# EAGLE board tirasRGB (EAGLE 6.5.0)
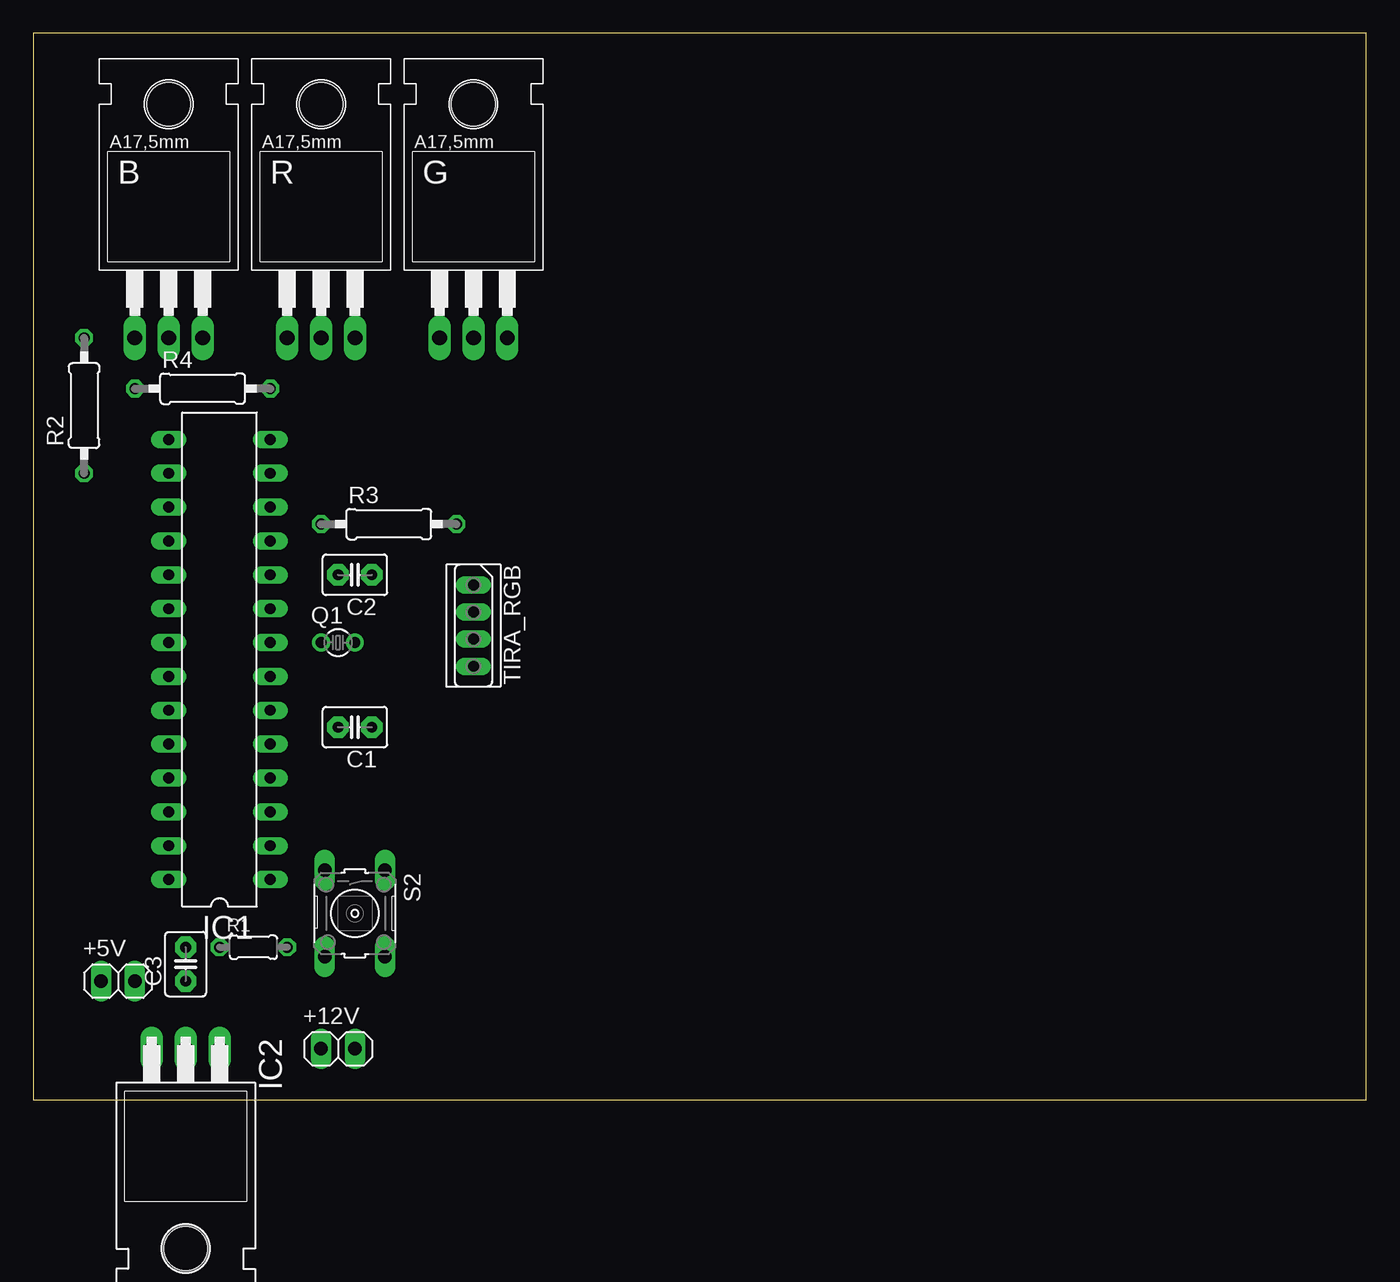
[diagram p0: board, top side]
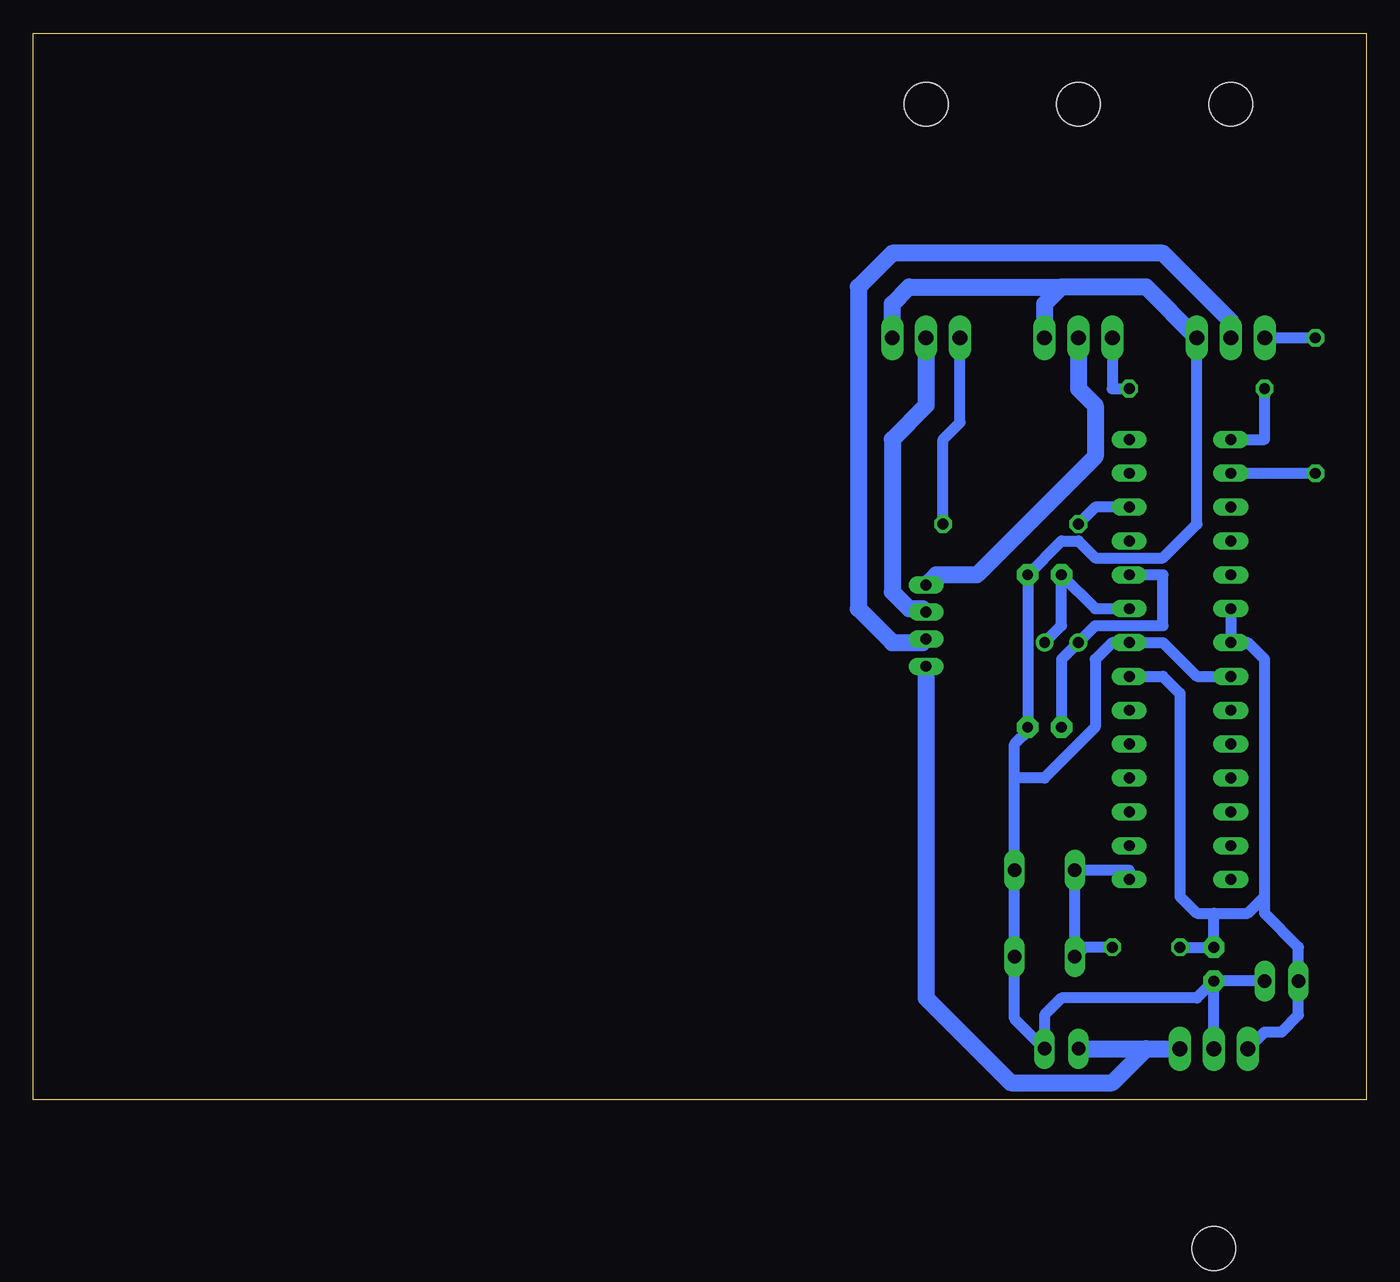
[diagram p1: board, bottom side, seen from below]

Size 100 x 80 mm. Coordinates in mm from the lower left corner, seen from the top.
Outline: 0,0 100,0 100,80 0,80 0,0
Copper layers (1*16): Top 0.035mm / dielectric 1.5mm / Bottom 0.035mm
Design rules "default": minimum track width 10mil, minimum drill 24mil, track to track 8mil, track to pad 8mil, pad to pad 8mil, via to via 8mil, smd to smd 8mil, copper to edge 40mil, drill to drill 8mil, minimum pad ring 10mil, minimum via ring 8mil, stop-mask expansion 4mil, vias tented up to drill 0mil, thermal gap 10mil

## Footprints (pad centres in the part's own frame; a part is rotated, then mirrored left to right if it is on the bottom)
1X02 = drill 1.016 long: 1 -1.27,0; 2 1.27,0
TO220 = drill 1.118 long: 1 -2.54,-6.35; 2 0,-6.35; 3 2.54,-6.35 | hole 3.302: 0,11.176
C2.5-3 = drill 0.813 pad 1.6 octagon: 1 -1.27,0; 2 1.27,0
DIL28-3 = drill 0.813 long: 1 -16.51,-3.81; 2 -13.97,-3.81; 3 -11.43,-3.81; 4 -8.89,-3.81; 5 -6.35,-3.81; 6 -3.81,-3.81; 7 -1.27,-3.81; 8 1.27,-3.81; 9 3.81,-3.81; 10 6.35,-3.81; 11 8.89,-3.81; 12 11.43,-3.81; 13 13.97,-3.81; 14 16.51,-3.81; 15 16.51,3.81; 16 13.97,3.81; 17 11.43,3.81; 18 8.89,3.81; 19 6.35,3.81; 20 3.81,3.81; 21 1.27,3.81; 22 -1.27,3.81; 23 -3.81,3.81; 24 -6.35,3.81; 25 -8.89,3.81; 26 -11.43,3.81; 27 -13.97,3.81; 28 -16.51,3.81
TO220H = drill 1.118 long: 1 -2.54,-10.16; 2 0,-10.16; 3 2.54,-10.16 | hole 3.302: 0,4.826
TC26V = drill 0.813: 1 -1.27,0; 2 1.27,0
0204/5 = drill 0.813 octagon: 1 -2.54,0; 2 2.54,0
0207/10 = drill 0.813 octagon: 1 -5.08,0; 2 5.08,0
B3F-10XX = drill 1.016 long: 1 -3.251,2.261; 2 3.251,2.261; 3 -3.251,-2.261; 4 3.251,-2.261
SPB4 = drill 0.813 long: 1 -3.048,0; 2 -1.016,0; 3 1.016,0; 4 3.048,0

## Placement (x,y rotation side)
+5V  [1X02]  6.35,8.89 0 top
+12V  [1X02]  22.86,3.81 0 top
B  2N5496  [TO220]  10.16,63.5 0 top
C1  [C2.5-3]  24.13,27.94 180 top
C2  [C2.5-3]  24.13,39.37 180 top
C3  [C2.5-3]  11.43,10.16 90 top
G  2N5496  [TO220]  33.02,63.5 0 top
IC1  MEGA8-P  [DIL28-3]  13.97,33.02 90 top
IC2  7805T  [TO220H]  11.43,-6.35 180 top
Q1  [TC26V]  22.86,34.29 0 top
R  2N5496  [TO220]  21.59,63.5 0 top
R1  [0204/5]  16.51,11.43 0 top
R2  [0207/10]  3.81,52.07 90 top
R3  [0207/10]  26.67,43.18 0 top
R4  [0207/10]  12.7,53.34 0 top
S2  [B3F-10XX]  24.13,13.97 270 top
TIRA_RGB  SPB4  [SPB4]  33.02,35.56 270 top

## Library data of the parts
+5V +12V = pinhead
B G R = transistor
C1-C3 = capacitor-wima
IC1 = atmel; OC_FARNELL: unknown; OC_NEWARK: unknown
IC2 = linear
Q1 = crystal; OC_FARNELL: unknown; OC_NEWARK: unknown
R1 = rcl
R2-R4 = eagle-ltspice; SPICEMODEL: NONE; SPICEPREFIX: R
S2 = switch-omron; MPN: B3F-1000; OC_FARNELL: 176432; OC_NEWARK: 36M3542
TIRA_RGB = con-hirschmann; OC_FARNELL: unknown; OC_NEWARK: unknown

## Nets
3.3V: +5V.1 C3.2 IC1.7 IC1.20 IC1.21 IC2.3 R1.1
GND: +5V.2 +12V.2 B.3 C1.1 C2.1 C3.1 G.3 IC1.8 IC1.22 IC2.2 R.3 S2.1 S2.2
N$1: B.1 R2.2
N$2: +12V.1 IC2.1 TIRA_RGB.4
N$3: G.1 R3.2
N$4: R4.2 R.1
N$5: R.2 TIRA_RGB.1
N$6: G.2 TIRA_RGB.2
N$7: B.2 TIRA_RGB.3
N$8: IC1.15 R4.1
N$9: IC1.12 R3.1
N$10: IC1.16 R2.1
N$14: C2.2 IC1.9 Q1.2
N$15: C1.2 IC1.10 Q1.1
N$16: IC1.1 R1.2 S2.3 S2.4

## Tracks (layer width: path | path; a pad name or v marks a point on that pad's centre or on a via)
3.3V
  Bottom 0.813: IC1.20 IC1.21 8.89,34.29 7.62,33.02 7.62,15.24 | IC1.7 15.24,31.75 13.97,30.48 13.97,15.24 12.7,13.97 11.43,13.97 | 11.43,13.97 8.89,13.97 7.62,15.24 | 11.43,13.97 C3.2 R1.1 | IC2.3 7.62,5.08 6.35,5.08 5.08,6.35 +5V.1 5.08,11.43 7.62,13.97 7.62,15.24
GND
  Bottom 0.813: 26.39,24.13 S2.1 S2.2 26.39,6.07 +12V.2 24.13,6.35 22.86,7.62 12.7,7.62 C3.1 | 26.39,24.13 26.39,26.67 25.4,27.66 C1.1 C2.1 22.86,41.91 21.59,41.91 20.32,40.64 15.24,40.64 12.7,43.18 B.3 | 26.39,24.13 24.13,24.13 20.32,27.94 20.32,33.02 19.05,34.29 IC1.8 15.24,34.29 12.7,31.75 IC1.22 | IC2.2 C3.1 | +5V.2 C3.1
  Bottom 1.27: B.3 16.51,60.96 22.86,60.96 | 22.86,60.96 24.13,59.69 R.3 | G.3 35.56,59.69 34.29,60.96 22.86,60.96
N$1
  Bottom 0.813: R2.2 B.1
N$2
  Bottom 1.27: +12V.1 16.51,3.81 | 16.51,3.81 IC2.1 | TIRA_RGB.4 33.02,7.62 26.67,1.27 19.05,1.27 16.51,3.81
N$3
  Bottom 0.813: R3.2 31.75,49.53 30.48,50.8 G.1
N$4
  Bottom 0.813: R.1 19.05,53.34 R4.2
N$5
  Bottom 1.27: R.2 21.59,53.34 20.32,52.07 20.32,48.26 29.21,39.37 32.26,39.37 TIRA_RGB.1
N$6
  Bottom 1.27: G.2 33.02,52.07 35.56,49.53 35.56,38.1 34.29,36.83 33.27,36.83 TIRA_RGB.2
N$7
  Bottom 1.27: B.2 10.16,58.42 15.24,63.5 35.56,63.5 38.1,60.96 38.1,36.83 35.56,34.29 33.27,34.29 TIRA_RGB.3
N$8
  Bottom 0.813: IC1.15 7.62,49.53 R4.1
N$9
  Bottom 0.813: IC1.12 20.32,44.45 R3.1
N$10
  Bottom 0.813: IC1.16 R2.1
N$14
  Bottom 0.813: IC1.9 20.32,36.83 C2.2 22.86,35.56 Q1.2
N$15
  Bottom 0.813: C1.2 22.86,33.02 Q1.1 20.32,35.56 15.24,35.56 15.24,39.37 IC1.10
N$16
  Bottom 0.813: IC1.1 17.78,17.22 S2.3 S2.4 21.16,11.43 R1.2